# Altium PCB QVAR6_VC_Backpack.PcbDoc (part 1 of 2)
Units mm, origin at the board's own origin, x right, y up, seen from the top; angles counter-clockwise.
Board outline 19.5 x 16.5 mm, 6 copper layers (Top Layer, Layer 1 (GND), Layer 2 (signal), Layer 3 (power), Layer 4 (GND), Bottom Layer), stack 1.138 mm thick; 113 components, 78 nets, 380 pads, 126 vias.
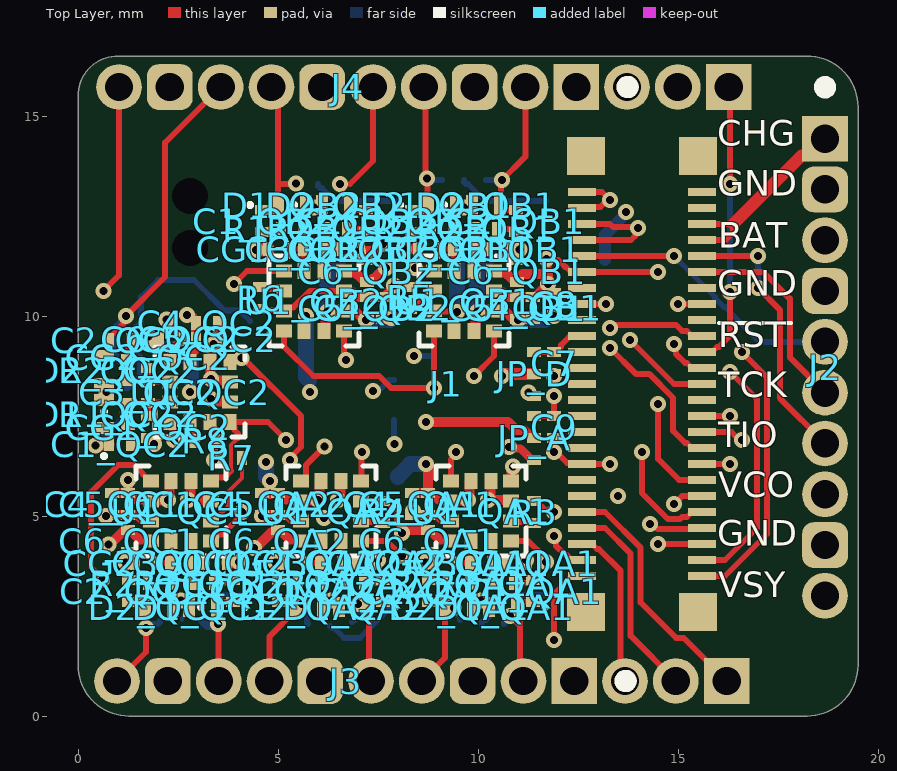
[diagram p0: Top Layer view]
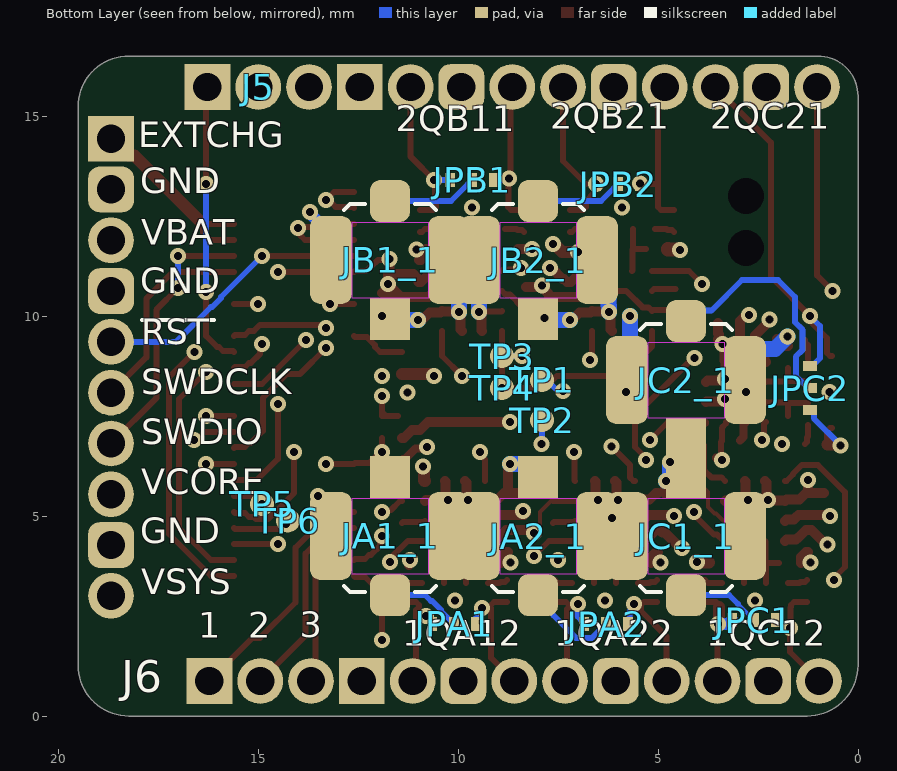
[diagram p1: Bottom Layer view, seen from below]
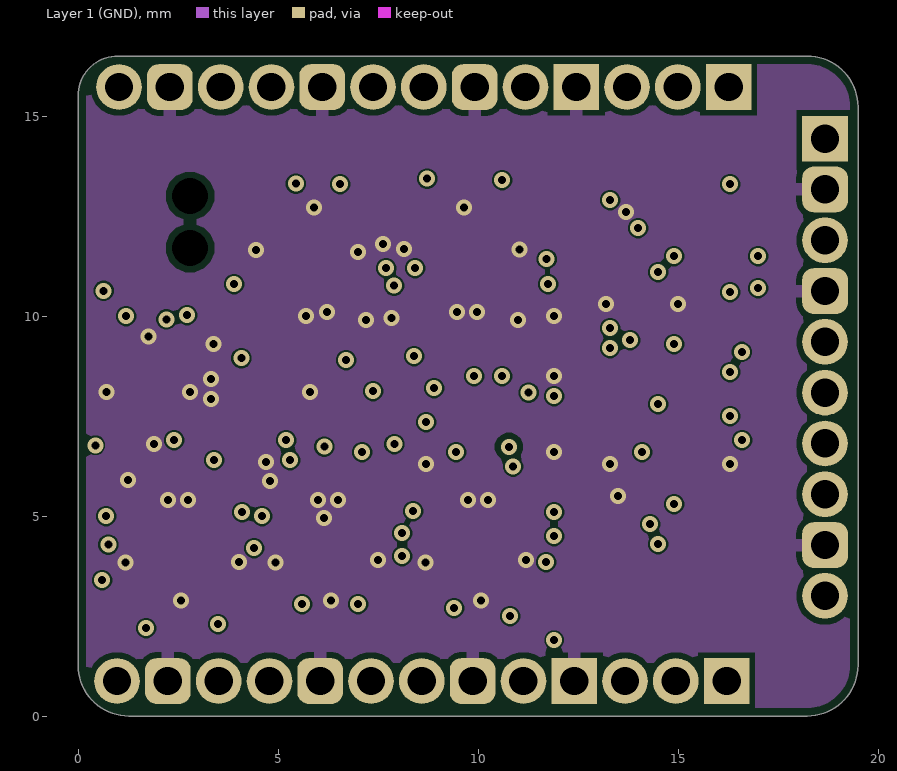
[diagram p2: Layer 1 (GND)]
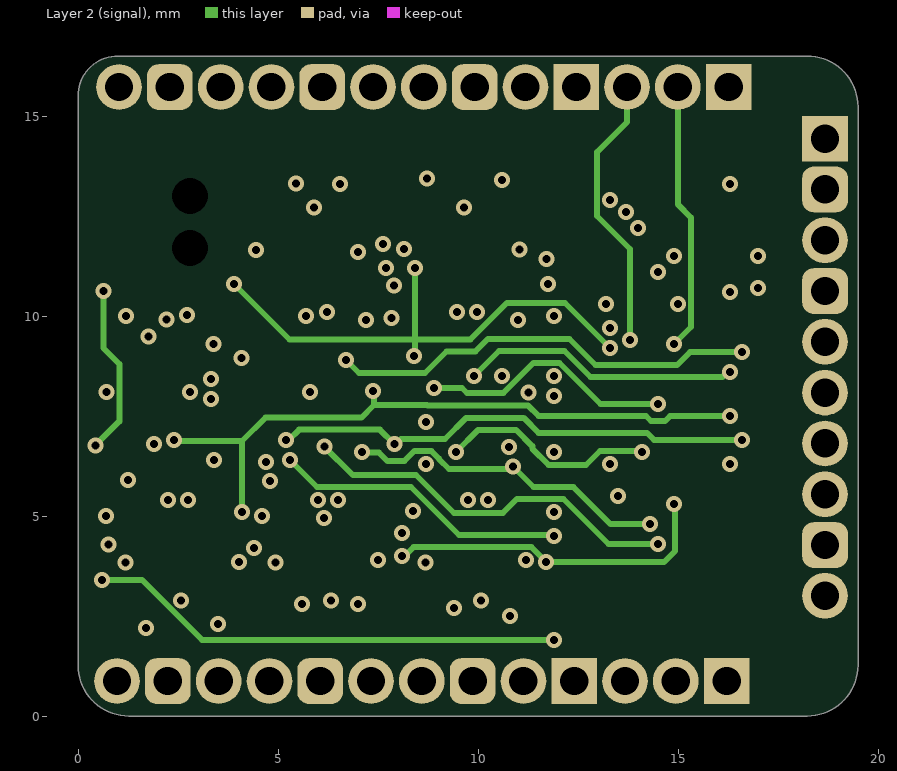
[diagram p3: Layer 2 (signal)]
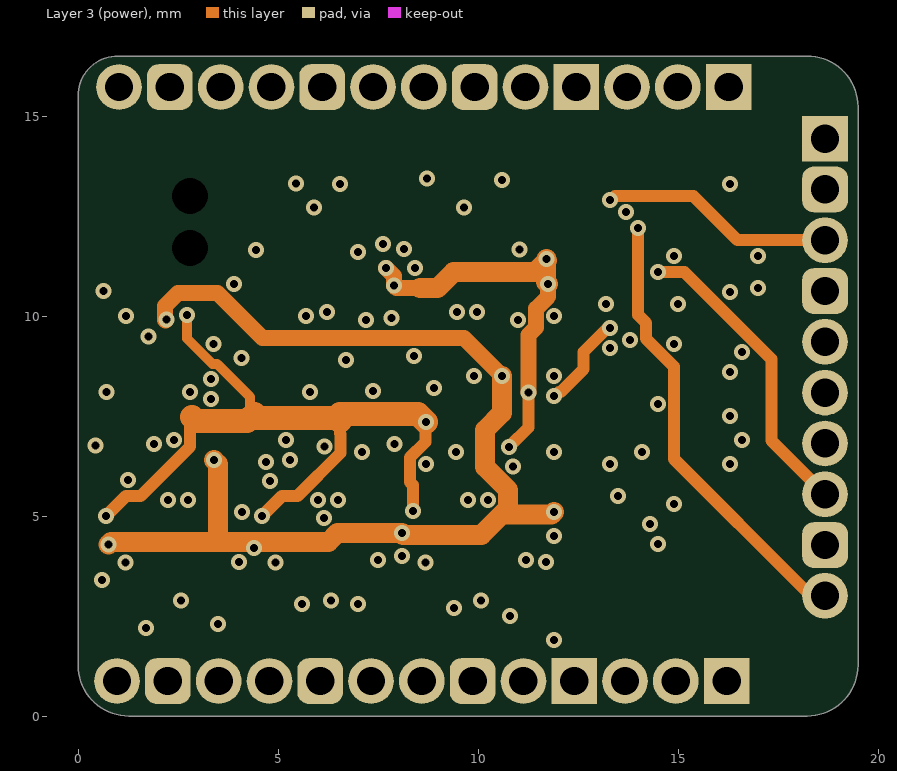
[diagram p4: Layer 3 (power)]

## Layer stack, top to bottom
Board Layer Stack Top Solder: solder mask 0.0254, SM-001, Dk 4
Top Layer: signal copper 0.035
Dielectric 1: prepreg 0.0994, 2313, Dk 4.05
Layer 1 (GND): signal copper 0.0152
Core 1: core 0.35, FR-4, Dk 4.5
Layer 2 (signal): signal copper 0.0152
Dielectric 2: prepreg 0.1088, 2116, Dk 4.25
Layer 3 (power): signal copper 0.0152
Core 2: core 0.35, FR-4, Dk 4.5
Layer 4 (GND): signal copper 0.0152
Dielectric 3: prepreg 0.0994, 2313, Dk 4.05
Bottom Layer: signal copper 0.035
Board Layer Stack Bottom Solder: solder mask 0.0254, SM-001, Dk 4

## Board outline
0,1.27 0,15.5 cw(c1,15.5) 1,16.5 18.23,16.5 cw(c18.23,15.23) 19.5,15.23 19.5,1.27 cw(c18.23,1.27) 18.23,0 1.27,0 cw(c1.27,1.27)

## Design rules (kind name [scope] priority, off if disabled: settings)
AcuteAngle [All] p1: minimum=6.00000000000000E+0001 checktracksonly=FALSE
BoardOutlineClearance [All] p1: gap=0.2 ignorepadtopadclearanceinfootprint=FALSE
Clearance Clearance_2 [OnLayer('Layer 1 (GND)') or OnLayer('Layer 2 (signal)') or OnLayer('Layer 3 (power)')] p1: gap=0.15 ignorepadtopadclearanceinfootprint=FALSE
Clearance Clearance_1 [All] p2: gap=0.1 ignorepadtopadclearanceinfootprint=FALSE
Clearance [All vs IsKeepOut] p3: gap=0 ignorepadtopadclearanceinfootprint=FALSE
ComponentClearance [All] p1: gap=0 collisioncheckmode=3 verticalgap=0.089 showdistances=TRUE donotcheckwithout3dbody=TRUE
DiffPairsRouting [All] p1: maxlimit=0.089 minlimit=0.089 mostfreqgap=0.089 toplayer_minwidth=0.089 toplayer_maxwidth=1816.048 toplayer_prefwidth=0.089 midlayer1_minwidth=0.089 midlayer1_maxwidth=1816.048 midlayer1_prefwidth=0.089 midlayer2_minwidth=0.089 midlayer2_maxwidth=1816.048 midlayer2_prefwidth=0.089 midlayer3_minwidth=0.089 midlayer3_maxwidth=1816.048 midlayer3_prefwidth=0.089 midlayer4_minwidth=0.089 midlayer4_maxwidth=1816.048 midlayer4_prefwidth=0.089 bottomlayer_minwidth=0.089 bottomlayer_maxwidth=1816.048 bottomlayer_prefwidth=0.089 maxuncoupledlength=12.7
Height [All] p1: minheight=0 maxheight=1816.048 prefheight=12.7
HoleSize [All] p1: absolutevalues=TRUE maxlimit=6.3 minlimit=0.2 maxpercent=80.000 minpercent=20.000
HoleToHoleClearance [All] p1: gap=0.25 allowstackedmicrovias=FALSE
MinimumAnnularRing [All] p1: minimumring=0.076
MinimumSolderMaskSliver [All] p1: minsoldermaskwidth=0.1
PlaneClearance [All] p1: clearance=0.089
PlaneConnect PlaneConnectPowerPads [InPadClass('PowerPads')] p1: planeconnectstyle=Direct reliefexpansion=0.508 reliefentries=4 reliefconductorwidth=0.254 reliefairgap=0.254
PlaneConnect [All] p2: pad.planeconnectstyle=Relief pad.reliefexpansion=0.3 pad.reliefentries=4 pad.reliefconductorwidth=0.089 pad.reliefairgap=0.089 via.planeconnectstyle=Direct via.reliefexpansion=0.3 via.reliefentries=4 via.reliefconductorwidth=0.127 via.reliefairgap=0.127
PolygonConnect PolygonConnectPowerPads [All vs (InPadClass('PowerPads'))] p1: connectstyle=Direct reliefconductorwidth=0.254 reliefentries=4 polygonreliefangle="90 Angle" airgapwidth=0.254
PolygonConnect [All] p2: thpad.connectstyle=Relief thpad.reliefconductorwidth=0.3 thpad.reliefentries=4 thpad.polygonreliefangle="90 Angle" thpad.airgapwidth=0.15 smdpad.connectstyle=Relief smdpad.reliefconductorwidth=0.2 smdpad.reliefentries=4 smdpad.polygonreliefangle="90 Angle" smdpad.airgapwidth=0.1 smdpad.conductorbypadedge=TRUE smdpad.mindistance=0.381 smdpad.enablemindistance=FALSE via.connectstyle=Direct via.reliefconductorwidth=0.127 via.reliefentries=4 via.polygonreliefangle="90 Angle" via.airgapwidth=0.127
RoomDefinition QA1 [InComponentClass('QA1')] p1: confinementstyle=ConfineIn formatcopy=FALSE lockcomponents=FALSE outline 7.925,2.1 11.9,2.1 11.9,6.8 7.925,6.8
RoomDefinition QB1 [InComponentClass('QB1')] p2: confinementstyle=ConfineIn formatcopy=TRUE lockcomponents=FALSE outline 11.8,13.4 7.825,13.4 7.825,8.7 11.8,8.7
RoomDefinition QB2 [InComponentClass('QB2')] p3: confinementstyle=ConfineIn formatcopy=TRUE lockcomponents=FALSE outline 8.05,13.4 4.075,13.4 4.075,8.7 8.05,8.7
RoomDefinition QC1 [InComponentClass('QC1')] p4: confinementstyle=ConfineIn formatcopy=FALSE lockcomponents=FALSE outline 0.425,2.1 4.4,2.1 4.4,6.8 0.425,6.8
RoomDefinition QA2 [InComponentClass('QA2')] p5: confinementstyle=ConfineIn formatcopy=FALSE lockcomponents=FALSE outline 4.175,2.1 8.15,2.1 8.15,6.8 4.175,6.8
RoomDefinition QC2 [InComponentClass('QC2')] p6: confinementstyle=ConfineIn formatcopy=FALSE lockcomponents=FALSE outline 0.025,10.25 0.025,6.275 4.725,6.275 4.725,10.25
RoutingVias [All] p1: holewidth=0.2 width=0.45 viastyle="Through Hole" minholewidth=0.2 minwidth=0.4 maxholewidth=6.3 maxwidth=6.55
SilkToSilkClearance [All] p1: silktosilkclearance=0
SilkToSolderMaskClearance SilkToSolderMaskClearance_1 [All] p1: minsilkscreentomaskgap=0.01 clearancetoexposedcopper=TRUE
SolderMaskExpansion SolderMaskExpansion_1 [IsVia] p1: expansion=0.102 istentingtop=TRUE
SolderMaskExpansion [All] p2: expansion=0.005 istentingtop=FALSE
Width [All] p1: maxlimit=1816.048 minlimit=0.089 preferedwidth=0.089
20 further rules are at their usual default settings.

## Classes and differential pairs
channel class QVAR: QA1 QA2 QB1 QB2 QC1 QC2
component class QC2: C1_QC2 C2_QC2 C3_QC2 C4_QC2 C5_QC2 C6_QC2 CG1_QC2 CG2_QC2 D1_QC2 D2_QC2 R1_QC2 R2_QC2 U1_QC2 U?_QC2
component class QC1: C1_QC1 C2_QC1 C3_QC1 C4_QC1 C5_QC1 C6_QC1 CG1_QC1 CG2_QC1 D1_QC1 D2_QC1 R1_QC1 R2_QC1 U1_QC1 U?_QC1
component class QB2: C1_QB2 C2_QB2 C3_QB2 C4_QB2 C5_QB2 C6_QB2 CG1_QB2 CG2_QB2 D1_QB2 D2_QB2 R1_QB2 R2_QB2 U1_QB2 U?_QB2
component class QB1: C1_QB1 C2_QB1 C3_QB1 C4_QB1 C5_QB1 C6_QB1 CG1_QB1 CG2_QB1 D1_QB1 D2_QB1 R1_QB1 R2_QB1 U1_QB1 U?_QB1
component class QA2: C1_QA2 C2_QA2 C3_QA2 C4_QA2 C5_QA2 C6_QA2 CG1_QA2 CG2_QA2 D1_QA2 D2_QA2 R1_QA2 R2_QA2 U1_QA2 U?_QA2
component class QA1: C1_QA1 C2_QA1 C3_QA1 C4_QA1 C5_QA1 C6_QA1 CG1_QA1 CG2_QA1 D1_QA1 D2_QA1 R1_QA1 R2_QA1 U1_QA1 U?_QA1

## Components (designator, comment, footprint, x,y, rotation, side; value= is the part's Value field where it differs from the comment)
C1_QA1 "470pF" CAP_0201 11.375,3.125 r90 top (schematic designator C1)
C1_QA2 "470pF" CAP_0201 7.625,3.125 r90 top (schematic designator C1)
C1_QB1 "470pF" CAP_0201 8.35,12.375 r270 top (schematic designator C1)
C1_QB2 "470pF" CAP_0201 4.6,12.375 r270 top (schematic designator C1)
C1_QC1 "470pF" CAP_0201 3.875,3.125 r90 top (schematic designator C1)
C1_QC2 "470pF" CAP_0201 1.05,6.8 r0 top (schematic designator C1)
C2_QA1 "470pF" CAP_0201 8.775,3.125 r90 top (schematic designator C2)
C2_QA2 "470pF" CAP_0201 5.025,3.125 r90 top (schematic designator C2)
C2_QB1 "470pF" CAP_0201 10.95,12.375 r270 top (schematic designator C2)
C2_QB2 "470pF" CAP_0201 7.2,12.375 r270 top (schematic designator C2)
C2_QC1 "470pF" CAP_0201 1.275,3.125 r90 top (schematic designator C2)
C2_QC2 "470pF" CAP_0201 1.05,9.4 r0 top (schematic designator C2)
C3_QA1 "110pF" CAP_0201 10.075,3.825 r180 top (schematic designator C3)
C3_QA2 "110pF" CAP_0201 6.325,3.825 r180 top (schematic designator C3)
C3_QB1 "110pF" CAP_0201 9.65,11.675 r0 top (schematic designator C3)
C3_QB2 "110pF" CAP_0201 5.9,11.675 r0 top (schematic designator C3)
C3_QC1 "110pF" CAP_0201 2.575,3.825 r180 top (schematic designator C3)
C3_QC2 "110pF" CAP_0201 1.75,8.1 r90 top (schematic designator C3)
C4_QA1 "1µF" CAP_0201 8.35,5.299 r90 top (schematic designator C4)
C4_QA2 "1µF" CAP_0201 4.6,5.299 r90 top (schematic designator C4)
C4_QB1 "1µF" CAP_0201 11.375,10.201 r270 top (schematic designator C4)
C4_QB2 "1µF" CAP_0201 7.625,10.201 r270 top (schematic designator C4)
C4_QC1 "1µF" CAP_0201 0.85,5.299 r90 top (schematic designator C4)
C4_QC2 "1µF" CAP_0201 3.224,9.825 r0 top (schematic designator C4)
C5_QA1 "100 nF" CAP_0201 8.75,5.3 r270 top (schematic designator C5)
C5_QA2 "100 nF" CAP_0201 5,5.3 r270 top (schematic designator C5)
C5_QB1 "100 nF" CAP_0201 10.975,10.2 r90 top (schematic designator C5)
C5_QB2 "100 nF" CAP_0201 7.225,10.2 r90 top (schematic designator C5)
C5_QC1 "100 nF" CAP_0201 1.25,5.3 r270 top (schematic designator C5)
C5_QC2 "100 nF" CAP_0201 3.225,9.425 r180 top (schematic designator C5)
C6_QA1 "100 nF" CAP_0201 8.75,4.375 r90 top (schematic designator C6)
C6_QA2 "100 nF" CAP_0201 5,4.375 r90 top (schematic designator C6)
C6_QB1 "100 nF" CAP_0201 10.975,11.125 r270 top (schematic designator C6)
C6_QB2 "100 nF" CAP_0201 7.225,11.125 r270 top (schematic designator C6)
C6_QC1 "100 nF" CAP_0201 1.25,4.375 r90 top (schematic designator C6)
C6_QC2 "100 nF" CAP_0201 2.3,9.425 r0 top (schematic designator C6)
C7 "1µF" CAP_0201 11.9,8.825 r270 top
C8 "1µF" CAP_0201 11.9,10.3 r270 top
C9 "1µF" CAP_0201 11.9,7.225 r270 top
CG1_QA1 "110pF" CAP_0201 10.95,3.825 r180 top (schematic designator CG1)
CG1_QA2 "110pF" CAP_0201 7.2,3.825 r180 top (schematic designator CG1)
CG1_QB1 "110pF" CAP_0201 8.775,11.675 r0 top (schematic designator CG1)
CG1_QB2 "110pF" CAP_0201 5.025,11.675 r0 top (schematic designator CG1)
CG1_QC1 "110pF" CAP_0201 3.45,3.825 r180 top (schematic designator CG1)
CG1_QC2 "110pF" CAP_0201 1.75,7.225 r90 top (schematic designator CG1)
CG2_QA1 "110pF" CAP_0201 9.2,3.825 r0 top (schematic designator CG2)
CG2_QA2 "110pF" CAP_0201 5.45,3.825 r0 top (schematic designator CG2)
CG2_QB1 "110pF" CAP_0201 10.525,11.675 r180 top (schematic designator CG2)
CG2_QB2 "110pF" CAP_0201 6.775,11.675 r180 top (schematic designator CG2)
CG2_QC1 "110pF" CAP_0201 1.7,3.825 r0 top (schematic designator CG2)
CG2_QC2 "110pF" CAP_0201 1.75,8.975 r270 top (schematic designator CG2)
D1_QA1 "TPD1E01B04DPYRQ1" TPD1E01B04DPYRQ1 10.625,2.725 r180 top (schematic designator D1)
D1_QA2 "TPD1E01B04DPYRQ1" TPD1E01B04DPYRQ1 6.875,2.725 r180 top (schematic designator D1)
D1_QB1 "TPD1E01B04DPYRQ1" TPD1E01B04DPYRQ1 9.1,12.775 r0 top (schematic designator D1)
D1_QB2 "TPD1E01B04DPYRQ1" TPD1E01B04DPYRQ1 5.35,12.775 r0 top (schematic designator D1)
D1_QC1 "TPD1E01B04DPYRQ1" TPD1E01B04DPYRQ1 3.125,2.725 r180 top (schematic designator D1)
D1_QC2 "TPD1E01B04DPYRQ1" TPD1E01B04DPYRQ1 0.65,7.55 r90 top (schematic designator D1)
D2_QA1 "TPD1E01B04DPYRQ1" TPD1E01B04DPYRQ1 9.525,2.725 r180 top (schematic designator D2)
D2_QA2 "TPD1E01B04DPYRQ1" TPD1E01B04DPYRQ1 5.775,2.725 r180 top (schematic designator D2)
D2_QB1 "TPD1E01B04DPYRQ1" TPD1E01B04DPYRQ1 10.2,12.775 r0 top (schematic designator D2)
D2_QB2 "TPD1E01B04DPYRQ1" TPD1E01B04DPYRQ1 6.45,12.775 r0 top (schematic designator D2)
D2_QC1 "TPD1E01B04DPYRQ1" TPD1E01B04DPYRQ1 2.025,2.725 r180 top (schematic designator D2)
D2_QC2 "TPD1E01B04DPYRQ1" TPD1E01B04DPYRQ1 0.65,8.65 r90 top (schematic designator D2)
J1 "VitalCore Interface v1.0" BACKPACK_INTERFACE_V1.0_2mm 1,8.3 r0 top
J2 "FTS-110-01-L-S" SAMTEC-FTS-110-01-L-S#1 18.675,8.72 r270 top
J3 "FTS-110-01-L-S" SAMTEC-FTS-110-01-L-S#2 6.69,0.875 r180 top
J4 "FTS-110-01-L-S" SAMTEC-FTS-110-01-L-S#2 6.74,15.725 r180 top
J5 "FTS-103-01-L-S" SAMTEC-FTS-103-01-X-S 14.995,15.725 r180 bottom
J6 "FTS-103-01-L-S" SAMTEC-FTS-103-01-X-S 14.945,0.875 r180 bottom
JA1_1 "CONMHF1-SMD-G-T" C-CONMHF1-SMD-G-T 11.7,4.5 r0 bottom
JA2_1 "CONMHF1-SMD-G-T" C-CONMHF1-SMD-G-T 8,4.5 r0 bottom
JB1_1 "CONMHF1-SMD-G-T" C-CONMHF1-SMD-G-T 11.7,11.4 r180 bottom
JB2_1 "CONMHF1-SMD-G-T" C-CONMHF1-SMD-G-T 8,11.4 r180 bottom
JC1_1 "CONMHF1-SMD-G-T" C-CONMHF1-SMD-G-T 4.3,4.5 r0 bottom
JC2_1 "CONMHF1-SMD-G-T" C-CONMHF1-SMD-G-T 4.3,8.4 r180 bottom
JP_A "JMP" JMP_0201_3way 11.4,6.95 r270 top
JP_D "JMP" JMP_0201_3way 11.4,8.55 r270 top
JPA1 "JMP" JMP_0201_3way 10.1,2.3 r180 bottom
JPA2 "JMP" JMP_0201_3way 6.3,2.3 r180 bottom
JPB1 "JMP" JMP_0201_3way 9.65,13.4 r0 bottom
JPB2 "JMP" JMP_0201_3way 6,13.3 r0 bottom
JPC1 "JMP" JMP_0201_3way 2.6,2.4 r180 bottom
JPC2 "JMP" JMP_0201_3way 1.2,8.2 r90 bottom
R1_QA1 "4.7k" RES_0201 10.625,3.325 r180 top (schematic designator R1)
R1_QA2 "4.7k" RES_0201 6.875,3.325 r180 top (schematic designator R1)
R1_QB1 "4.7k" RES_0201 9.1,12.175 r0 top (schematic designator R1)
R1_QB2 "4.7k" RES_0201 5.35,12.175 r0 top (schematic designator R1)
R1_QC1 "4.7k" RES_0201 3.125,3.325 r180 top (schematic designator R1)
R1_QC2 "4.7k" RES_0201 1.25,7.55 r90 top (schematic designator R1)
R2_QA1 "4.7k" RES_0201 9.525,3.325 r0 top (schematic designator R2)
R2_QA2 "4.7k" RES_0201 5.775,3.325 r0 top (schematic designator R2)
R2_QB1 "4.7k" RES_0201 10.2,12.175 r180 top (schematic designator R2)
R2_QB2 "4.7k" RES_0201 6.45,12.175 r180 top (schematic designator R2)
R2_QC1 "4.7k" RES_0201 2.025,3.325 r0 top (schematic designator R2)
R2_QC2 "4.7k" RES_0201 1.25,8.65 r270 top (schematic designator R2)
R3 "4.7k" RES_0201 11.4,5.1 r270 top
R4 "4.7k" RES_0201 7.625,5.102 r270 top
R5 "4.7k" RES_0201 8.3,10.45 r270 top
R6 "4.7k" RES_0201 4.55,10.45 r90 top
R7 "4.7k" RES_0201 3.825,6.446 r0 top
R8 "4.7k" RES_0201 3.182,6.876 r180 top
TP1 "Test Pad" Pad-0.6mm 7.9,8.4 r90 bottom
TP2 "Test Pad" Pad-0.6mm 7.9,7.4 r90 bottom
TP3 "Test Pad" Pad-0.6mm 8.9,9 r90 bottom
TP4 "Test Pad" Pad-0.6mm 8.9,8.2 r90 bottom
TP5 "Test Pad" Pad-0.6mm 14.9,5.3 r90 bottom
TP6 "Test Pad" Pad-0.6mm 14.252,4.886 r90 bottom
U1_QA1 "LIS2DUXS12TR" QFN_DUXS12_STM-M 10.075,5.125 r180 top (schematic designator U1)
U1_QA2 "LIS2DUXS12TR" QFN_DUXS12_STM-M 6.325,5.125 r180 top (schematic designator U1)
U1_QB1 "LIS2DUXS12TR" QFN_DUXS12_STM-M 9.65,10.375 r0 top (schematic designator U1)
U1_QB2 "LIS2DUXS12TR" QFN_DUXS12_STM-M 5.9,10.375 r0 top (schematic designator U1)
U1_QC1 "LIS2DUXS12TR" QFN_DUXS12_STM-M 2.575,5.125 r180 top (schematic designator U1)
U1_QC2 "LIS2DUXS12TR" QFN_DUXS12_STM-M 3.05,8.1 r90 top (schematic designator U1)

## Footprints (in the part's own frame and the unit in brackets; to place one, negate y for a bottom-side part, rotate by r counter-clockwise, add the part's x,y. Pads: shape width x height; smd on the part's side, far side on the other; paste and mask are expansions set on the pad)
BACKPACK_INTERFACE_V1.0_2mm [mm]
  rect 0.7x0.2 smd: 1(11.6,4.8) 2(11.6,4.4) 3(11.6,4) 4(11.6,3.6) 5(11.6,3.2) 6(11.6,2.8) 7(11.6,2.4) 8(11.6,2) 9(11.6,1.6) 10(11.6,1.2) 11(11.6,0.8) 12(11.6,0.4) 13(11.6,0) 14(11.6,-0.4) 15(11.6,-0.8) 16(11.6,-1.2) 17(11.6,-1.6) 18(11.6,-2) 19(11.6,-2.4) 20(11.6,-2.8) 21(11.6,-3.2) 22(11.6,-3.6) 23(11.6,-4) 24(11.6,-4.4) 25(11.6,-4.8) 26(14.6,-4.8) 27(14.6,-4.4) 28(14.6,-4) 29(14.6,-3.6) 30(14.6,-3.2) 31(14.6,-2.8) 32(14.6,-2.4) 33(14.6,-2) 34(14.6,-1.6) 35(14.6,-1.2) 36(14.6,-0.8) 37(14.6,-0.4) 38(14.6,0) 39(14.6,0.4) 40(14.6,0.8) 41(14.6,1.2) 42(14.6,1.6) 43(14.6,2) 44(14.6,2.4) 45(14.6,2.8) 46(14.6,3.2) 47(14.6,3.6) 48(14.6,4) 49(14.6,4.4) 50(14.6,4.8)
  round 0 hole 0.9 unplated: E(1.8,3.4) E(1.8,4.7)
  rect 0.95x0.95 smd: E(11.7,-5.7) E(11.7,5.7) E(14.5,-5.7) E(14.5,5.7)
  body extent 0,-6.3 14.79,6.3, height 2.9
C-CONMHF1-SMD-G-T [mm]
  rrect50% 1.05x2.2 smd: G(-1.475,0) G(1.475,0)
  rect 1x1.05 smd: G(0,-1.475)
  rrect50% 1x1.05 smd: S(0,1.475)
  Top Layer keep-out region: -0.95,0.95 0.95,0.95 0.95,-0.95 -0.95,-0.95
  silkscreen extent -1.15,1.25 1.15,1.4, body extent -1.5,-1.55 1.5,1.55, height 1.31
CAP_0201 [mm]
  rect 0.25x0.35 smd: 1(-0.275,0) 2(0.275,0)
  body extent -0.3,-0.15 0.3,0.15, height 0.3
JMP_0201_3way [mm] "Jumper 3 pins 0201x2"
  rect 0.25x0.35 smd: 1(-0.55,0) 2(0,0) 3(0.55,0)
  body extent -0.57,-0.15 0.57,0.15, height 0.22
Pad-0.6mm [mm] "SMT Test Pad"
  round 0.6 smd paste-5: 1(0,0)
QFN_DUXS12_STM-M [mil]
  rect 15.94x12.97 smd paste+0 mask+0: 1(-29.5,29.53) 2(-29.5,9.85) 3(-29.5,-9.84) 4(-29.5,-29.53) 7(29.5,-29.53) 8(29.5,-9.84) 9(29.5,9.85) 10(29.5,29.53)
  rect 12.97x15.94 smd paste+0 mask+0: 5(-9.84,-29.5) 6(9.85,-29.5) 11(9.85,29.5) 12(-9.84,29.5)
  silkscreen extent -44,-44 44,44, body extent -41,-41 41,41, height 29
RES_0201 [mm] "Chip Resistor, 2-Leads, Body 0.60x0.30mm, IPC Medium Density"
  rect 0.25x0.35 smd: 1(-0.275,0) 2(0.275,0)
  body extent -0.3,-0.15 0.3,0.15, height 0.22
SAMTEC-FTS-103-01-X-S [mil]
  rect 45x45 hole 27.95 mask+0: 1(-50,0)
  round 45 hole 27.95 mask+0: 2(0,0) 3(50,0)
  body extent -75,-43 75,43, height 154
SAMTEC-FTS-110-01-L-S#1 [mil]
  rect 45x45 hole 27.95 mask+0: 1(-225,0)
  rrect50% 45x45 hole 27.95 mask+0: 2(-175,0) 4(-75,0) 9(175,0)
  round 45 hole 27.95 mask+0: 3(-125,0) 5(-25,0) 6(25,0) 7(75,0) 8(125,0) 10(225,0)
  silkscreen extent -281,-5 -270,6, body extent -250,-43 250,43, height 154
SAMTEC-FTS-110-01-L-S#2 [mil]
  rect 45x45 hole 27.95 mask+0: 1(-225,0)
  round 45 hole 27.95 mask+0: 2(-175,0) 4(-75,0) 5(-25,0) 7(75,0) 8(125,0) 10(225,0)
  rrect50% 45x45 hole 27.95 mask+0: 3(-125,0) 6(25,0) 9(175,0)
  silkscreen extent -281,-6 -270,6, body extent -250,-43 250,43, height 154
TPD1E01B04DPYRQ1 [mm]
  rect 0.3x0.5 smd: 1(-0.35,0) 2(0.35,0)
  silkscreen extent -1.1,-0.05 -1,0.05, body extent -0.5,-0.3 0.5,0.3, height 0.55

## Part data
C1_QA1 C1_QA2 C1_QB1 C1_QB2 C1_QC1 C1_QC2 C2_QA1 C2_QA2 C2_QB1 C2_QB2 C2_QC1 C2_QC2: library part CAP_0201_470p_25V, "CAP CER 470PF 25V C0G 0201", Capacitor Type=Ceramic, Case/Package=0201, Manufacturer=Murata, Manufacturer Part Number=GRM0335C1E471JA01D, Max Operating Temperature=125°C, Min Operating Temperature=-55°C, Package Shape=Rectangular, Rated DC Voltage (URdc)=25V, Supplier Part Number 1=490-16370-6-ND, Temperature Characteristics Code=C0G, Tolerance  (fill in as +-)=5%, Category="Ceramic Capacitors", ComponentLink1Description=https://psearch.en.murata.com:443/capacitor/product/GRM0335C1E471JA01%23.pdf?src-supplier=IHS+Markit, ComponentLink1URL=https://psearch.en.murata.com:443/capacitor/product/GRM0335C1E471JA01%23.pdf?src-supplier=IHS+Markit, ComponentLink2Description=http://search.murata.co.jp/Ceramy/image/img/A01X/G101/ENG/GRM0335C1E471JA01-01.pdf?src-supplier=Digi-Key, ComponentLink2URL=http://search.murata.co.jp/Ceramy/image/img/A01X/G101/ENG/GRM0335C1E471JA01-01.pdf?src-supplier=Digi-Key, ComponentLink3Description=https://search.murata.co.jp/Ceramy/image/img/A01X/G101/ENG/GRM0335C1E471JA01-01.pdf?src-supplier=Digi-Key, ComponentLink3URL=https://search.murata.co.jp/Ceramy/image/img/A01X/G101/ENG/GRM0335C1E471JA01-01.pdf?src-supplier=Digi-Key, ComponentLink4Description=https://datasheet.octopart.com/GRM0335C1E471JA01D-Murata-datasheet-165579666.pdf?src-supplier=TME, ComponentLink4URL=https://datasheet.octopart.com/GRM0335C1E471JA01D-Murata-datasheet-165579666.pdf?src-supplier=TME, Dielectric Material=Ceramic, JESD-609 Code=e3, Mounting Technology="Surface Mount", Multilayer=Yes, Packaging="Tape and Reel", Pins=2, Pricing 1="1=0.1, 10=0.012, 50=0.0066, 100=0.0054, 500=0.00382, 1000=0.003, 2500=0.00273, 5000=0.00251 (USD)", Reach SVHC Compliant=Yes, RoHS=Yes, RoHS Compliant=Yes, Stock 1=235620, Supplier 1=Digi-Key, Terminal Finish=Tin, Termination=Wraparound, Tolerance (fill in as +-)=5%
C3_QA1 C3_QA2 C3_QB1 C3_QB2 C3_QC1 C3_QC2 CG1_QA1 CG1_QA2 CG1_QB1 CG1_QB2 CG1_QC1 CG1_QC2 CG2_QA1 CG2_QA2 CG2_QB1 CG2_QB2 CG2_QC1 CG2_QC2: library part CAP_0201_110p_50V, "CAP CER 110PF 50V C0G 0201", Manufacturer=Murata, Manufacturer Part Number=GRM0335C1H111JA01D, Supplier Part Number 1=81-GRM0335C1H111JA1D, Supplier 1=Mouser
C4_QA1 C4_QA2 C4_QB1 C4_QB2 C4_QC1 C4_QC2 C7 C8 C9: library part CAP_0201_1u_10V, "CAP CER 1UF 10V X6S", Manufacturer=Murata, Manufacturer Part Number=GRM033C81A105ME05D, Supplier Part Number 1=81-GRM033C81A105ME5D, Supplier 1=Mouser
C5_QA1 C5_QA2 C5_QB1 C5_QB2 C5_QC1 C5_QC2 C6_QA1 C6_QA2 C6_QB1 C6_QB2 C6_QC1 C6_QC2: library part CAP_0201_100n_10V, "CAP CER 0.1UF 10V X5R 0201", Manufacturer=Murata, Manufacturer Part Number=GRM033Z71A104KE14D, Supplier Part Number 1=81-GRM033Z71A104KE4D, Supplier 1=Mouser
D1_QA1 D1_QA2 D1_QB1 D1_QB2 D1_QC1 D1_QC2 D2_QA1 D2_QA2 D2_QB1 D2_QB2 D2_QC1 D2_QC2: "TVS Diode (Bi-directional)", Manufacturer_Name="Texas Instruments", Mouser Part Number=595-TPD1E01B04DPYRQ1, Arrow Part Number=TPD1E01B04DPYRQ1, Arrow Price/Stock=https://www.arrow.com/en/products/tpd1e01b04dpyrq1/texas-instruments?region=nac, Datasheet Link=https://www.ti.com/lit/ds/symlink/tpd1e01b04-q1.pdf?ts=1677834076075&ref_url=https%253A%252F%252Fwww.ti.com%252Fproduct%252FTPD1E01B04-Q1%252Fpart-details%252FTPD1E01B04DPYRQ1, Height=0.45mm, Manufacturer_Part_Number=TPD1E01B04DPYRQ1, Mouser Price/Stock=https://www.mouser.co.uk/ProductDetail/Texas-Instruments/TPD1E01B04DPYRQ1?qs=doiCPypUmgEwTnvBpZhkOw%3D%3D
J1: library part BACKPACK_INTERFACE_V1.0, Manufacturer=Hirose, Manufacturer Part Number=DF40C(2.0)-50DS-0.4V(51), Supplier Part Number 1=798-DF40C2050DS04V51, Supplier 1=Mouser, System=Connector
J2 J3 J4: "Pinheader 10 pin, 1.27mm", Flammability Rating="UL94 V-0", Manufacturer=Samtec, Manufacturer Series=FTS, Supplier Part Number 1=200-FTS11001LS, Additional Feature="Low Profile", Category=Connectors, ComponentLink1Description=https://datasheet.ciiva.com:443/pdfs/VipMasterIC/IC/SAMI/SAMI-S-A0001504673/SAMI-S-A0001504673-1.pdf?src-supplier=IHS+Markit, ComponentLink1URL=https://datasheet.ciiva.com:443/pdfs/VipMasterIC/IC/SAMI/SAMI-S-A0001504673/SAMI-S-A0001504673-1.pdf?src-supplier=IHS+Markit, ComponentLink2Description=http://www.samtec.com/documents/webfiles/pdf/FTS.pdf?src-supplier=Avnet, ComponentLink2URL=http://www.samtec.com/documents/webfiles/pdf/FTS.pdf?src-supplier=Avnet, ComponentLink3Description=https://datasheet.octopart.com/FTS-110-01-L-S-Samtec-datasheet-151470456.pdf?src-supplier=Sager+Electronics, ComponentLink3URL=https://datasheet.octopart.com/FTS-110-01-L-S-Samtec-datasheet-151470456.pdf?src-supplier=Sager+Electronics, ComponentLink4Description=https://datasheet.octopart.com/FTS-110-01-L-S-Samtec-datasheet-118493358.pdf?src-supplier=Electro+Sonic, ComponentLink4URL=https://datasheet.octopart.com/FTS-110-01-L-S-Samtec-datasheet-118493358.pdf?src-supplier=Electro+Sonic, ComponentLink5Description=https://datasheet.octopart.com/FTS-110-01-L-S-Samtec-datasheet-116535195.pdf?src-supplier=Toby+Electronics, ComponentLink5URL=https://datasheet.octopart.com/FTS-110-01-L-S-Samtec-datasheet-116535195.pdf?src-supplier=Toby+Electronics, Connector Type="BOARD CONNECTOR", Contact Finish - Mating="GOLD (10) OVER NICKEL (50)", Contact Finish - Termination="Matte Tin (Sn) - with Nickel (Ni) barrier", Contact Gender=Male, Contact Material=Bronze, DIN Conformance=No, Filter Feature=No, IEC Conformance=No, JESD-609 Code=e3, Manufacturer Part Number=FTS-110-01-L-S, MIL Conformance=No, Mixed Contacts=No, Mounting Style=STRAIGHT, Mounting Technology=Board, Number of Contacts=10, Number of Rows Loaded=1, Option="General Purpose", Pricing 1="1=2.85, 10=2.62, 50=2.62, 100=2.28, 1000=1.66, 10000=1.48 (USD)", Reach SVHC Compliant=Yes, RoHS=Yes, RoHS Compliant=Yes, Stock 1=83, Supplier 1=Mouser, Terminal Pitch=1.27mm, Termination=Solder
J5 J6: "Pinheader 3 pin, 1.27mm", Flammability Rating="UL94 V-0", Manufacturer=Samtec, Manufacturer Series=FTS, Additional Feature="Low Profile", Category=Connectors, ComponentLink1Description=https://datasheet.ciiva.com:443/pdfs/VipMasterIC/IC/SAMI/SAMI-S-A0001504673/SAMI-S-A0001504673-1.pdf?src-supplier=IHS+Markit, ComponentLink1URL=https://datasheet.ciiva.com:443/pdfs/VipMasterIC/IC/SAMI/SAMI-S-A0001504673/SAMI-S-A0001504673-1.pdf?src-supplier=IHS+Markit, ComponentLink2Description=http://suddendocs.samtec.com/prints/fts-1xx-xx-x-sx-mkt.pdf?src-supplier=Digi-Key, ComponentLink2URL=http://suddendocs.samtec.com/prints/fts-1xx-xx-x-sx-mkt.pdf?src-supplier=Digi-Key, ComponentLink3Description=http://suddendocs.samtec.com/prints/fts-1xx-xx-xx-xx-xx-mkt.pdf?src-supplier=Digi-Key, ComponentLink3URL=http://suddendocs.samtec.com/prints/fts-1xx-xx-xx-xx-xx-mkt.pdf?src-supplier=Digi-Key, ComponentLink4Description=ftp://ftp.samtec.com/webfiles/PDF/FTS.PDF?src-supplier=Avnet, ComponentLink4URL=ftp://ftp.samtec.com/webfiles/PDF/FTS.PDF?src-supplier=Avnet, Connector Type="BOARD CONNECTOR", Contact Finish - Mating="GOLD (10) OVER NICKEL (50)", Contact Finish - Termination="Matte Tin (Sn) - with Nickel (Ni) barrier", Contact Gender=Male, Contact Material=Bronze, DIN Conformance=No, Filter Feature=No, IEC Conformance=No, JESD-609 Code=e3, Manufacturer Part Number=FTS-103-01-L-S, MIL Conformance=No, Mixed Contacts=No, Mounting Style=STRAIGHT, Mounting Technology=Board, Number of Contacts=3, Number of Rows Loaded=1, Option="General Purpose", Pricing 1="1=1.334, 5=1.281, 10=1.208 (CHF)", Reach SVHC Compliant=Yes, RoHS=Yes, RoHS Compliant=Yes, Stock 1=187, Supplier 1=Rs, Terminal Pitch=1.27mm, Termination=Solder
JA1_1 JA2_1 JB1_1 JB2_1 JC1_1 JC2_1: "Conn Umc Jack Str SMD", Manufacturer=Linx, Category="RF / Coaxial Connectors", Manufacturer Part Number=CONMHF1-SMD-G-T, Pricing 1="2=0.54, 20=0.39, 100=0.33, 500=0.27 (EUR)", RoHS=No, Stock 1=263, Supplier 1=TME
JP_A JP_D JPA1 JPA2 JPB1 JPB2 JPC1 JPC2: library part JMP_0201_3w, "JMP 0201 3W"
R1_QA1 R1_QA2 R1_QB1 R1_QB2 R1_QC1 R1_QC2 R2_QA1 R2_QA2 R2_QB1 R2_QB2 R2_QC1 R2_QC2 R3 R4 R5 R6 R7 R8: library part R_0201_4.7K, "R 4.7K 1% 50mW 0201", Case/Package=0201, Manufacturer=Panasonic, Manufacturer Part Number=ERJ-1GNF4701C, Max Operating Temperature=125°C, Min Operating Temperature=-55°C, Package Height=0.23mm, Package Length=0.6mm, Package Shape=Rectangular, Package Style=SMTMeter, Package Width=0.3mm, Power=50mW, Rated Temperature=70°C, Resistor Type="FIXED RESISTOR", Supplier Part Number 1=667-ERJ-1GNF4701C, Temperature Coefficient=200ppm/°C, Tolerance=1%, Working Voltage=25V, Category="Chip SMD Resistors", ComponentLink1Description=https://datasheet.ciiva.com:443/pdfs/VipMasterIC/IC/PANA/PANA-S-A0009889626/PANA-S-A0009889626-1.pdf?src-supplier=IHS+Markit, ComponentLink1URL=https://datasheet.ciiva.com:443/pdfs/VipMasterIC/IC/PANA/PANA-S-A0009889626/PANA-S-A0009889626-1.pdf?src-supplier=IHS+Markit, ComponentLink2Description=https://datasheet.ciiva.com/30079/erj1gn-30079779.pdf?src-supplier=Onlinecomponents.com, ComponentLink2URL=https://datasheet.ciiva.com/30079/erj1gn-30079779.pdf?src-supplier=Onlinecomponents.com, ComponentLink3Description=https://datasheet.ciiva.com/43467/1678782-43467070.pdf?src-supplier=Farnell, ComponentLink3URL=https://datasheet.ciiva.com/43467/1678782-43467070.pdf?src-supplier=Farnell, ComponentLink4Description=https://datasheet.ciiva.com/46375/1678782-46375115.pdf?src-supplier=Element14, ComponentLink4URL=https://datasheet.ciiva.com/46375/1678782-46375115.pdf?src-supplier=Element14, ComponentLink5Description=https://datasheet.ciiva.com/22743/1678782-22743083.pdf?src-supplier=Element14, ComponentLink5URL=https://datasheet.ciiva.com/22743/1678782-22743083.pdf?src-supplier=Element14, ComponentLink6Description=https://datasheet.ciiva.com/16201/aoa0000ce2-16201382.pdf?src-supplier=Future+Electronics, ComponentLink6URL=https://datasheet.ciiva.com/16201/aoa0000ce2-16201382.pdf?src-supplier=Future+Electronics, ComponentLink7Description=https://datasheet.ciiva.com/7830/1678782-7830714.pdf?src-supplier=Element14, ComponentLink7URL=https://datasheet.ciiva.com/7830/1678782-7830714.pdf?src-supplier=Element14, ComponentLink8Description=https://datasheet.ciiva.com/22743/1678782-22743082.pdf?src-supplier=Element14, ComponentLink8URL=https://datasheet.ciiva.com/22743/1678782-22743082.pdf?src-supplier=Element14, Construction=Rectangular, JESD-609 Code=e3, Mounting Technology="Surface Mount", Packaging="Tape and Reel", Pins=2, Pricing 1="1=0.1, 10=0.03, 50=0.03, 100=0.014, 1000=0.01, 10000=0.007 (USD)", Reach SVHC Compliant=Yes, Reference Standard=AEC-Q200, RoHS=Yes, RoHS Compliant=Yes, Stock 1=436636, Supplier 1=Mouser, Technology="METAL GLAZE/THICK FILM", Terminal Finish=Nickel, Termination=Wraparound
TP1 TP2 TP3 TP4 TP5 TP6: library part CMP-00224-2, "0.6mm SMT Test Pad", Mounting Technology=SMT
U1_QA1 U1_QA2 U1_QB1 U1_QB2 U1_QC1 U1_QC2: "IC IMU QVAR", Mfr_Name=STMicroelectronics, Copyright="Copyright (C) 2023 Ultra Librarian. All rights reserved.", Manufacturer_Part_Number=LIS2DUXS12TR, RefDes=RefDes, Type=DEV

## Via types
v1: diameter 0.4, hole 0.2, Top Layer to Bottom Layer, tented both sides, 126 vias

## Nets (pads, with @x,y where several pads share a name; then routed paths per layer and width w, separated by ;. In a path a pad name is that pad's centre, name@x,y a point inside that pad or via, vN(x,y) a via of type N, cw(c..) or ccw(c..) an arc to the next point about the centre after c; other vN are vias at no path point)
A1V8_VDD: C4_QA1.1 C4_QA2.1 C4_QC1.1 C4_QC2.1 C5_QA1.2 C5_QA2.2 C5_QC1.2 C5_QC2.2 JP_A.2 U1_QA1.9 U1_QA2.9 U1_QC1.9 U1_QC2.9 | length 26.7
  Top Layer w0.25: C4_QC1.1 C5_QC1.2@1.199,5.024 ; C5_QC1.2@1.2,5.025 1.49,5.025 1.515,5 1.518,5 1.604,4.915 1.786,4.915 U1_QC1.9 ; v1(2.725,10.025) 2.754,9.996 2.828,9.996 2.949,9.875 2.949,9.476 2.95,9.185 2.925,9.16 2.925,9.157 2.84,9.071 2.84,8.889 U1_QC2.9 ; v1(4.6,5) C4_QA2.1 C5_QA2.2@4.949,5.024 ; C5_QA2.2@4.95,5.025 5.24,5.025 5.265,5 5.268,5 5.354,4.915 5.536,4.915 U1_QA2.9 ; C4_QA1.1@8.3,5.1 8.3,5.074 C4_QA1.1 C5_QA1.2@8.699,5.024 ; C5_QA1.2@8.7,5.025 8.99,5.025 9.015,5 9.018,5 9.104,4.915 9.286,4.915 U1_QA1.9 ; v1(8.7,7.35) 10.753,7.35 10.953,7.15 11.15,7.15 11.35,6.95 JP_A.2
  Layer 3 (power) w0.25: v1(2.725,10.025) 2.725,9.438 3.363,8.8 3.48,8.8 4.3,7.98 4.3,7.454
  Layer 3 (power) w0.3: v1(0.7,5) 1.2,5.5 1.566,5.5 2.8,6.734 2.8,7.425 2.85,7.475 ; v1(4.6,5) 5.1,5.5 5.487,5.5 6.558,6.57 6.558,7.056 6.546,7.068 6.546,7.554 ; v1@8.4,5.1 8.371,5.129 8.371,5.775 8.3,5.846 8.3,6.466 8.681,6.847 8.681,7.331 v1(8.7,7.35)
  Layer 3 (power) w0.6: 2.85,7.475 2.95,7.375 4.23,7.375 ; 4.409,7.554 4.23,7.375 ; 6.546,7.379 6.475,7.45 4.305,7.45 4.23,7.375 ; 6.546,7.554 8.496,7.554 v1(8.7,7.35)
  other v1: 8.375,5.125
D1V8_VDDIO: C6_QA1.2 C6_QA2.2 C6_QC1.2 C6_QC2.2 JP_D.2 R3.1 R4.1 R7.1 R8.1 U1_QA1.10 U1_QA2.3 U1_QA2.10 U1_QC1.10 U1_QC2.3 U1_QC2.10 | length 36.7
  Top Layer w0.1: R4.1 7.675,5.377 7.95,5.102 7.95,4.806 8.1,4.656 v1@8.1,4.6
  Top Layer w0.15: U1_QC2.3 3.3,7.313 3.407,7.207 3.407,6.876 3.428,6.854 3.428,6.428 v1(3.4,6.4) ; U1_QA2.3@7.075,5.376 R4.1 ; R3.1 11.45,5.375 11.677,5.148
  Top Layer w0.2: v1(3.4,6.4) 3.423,6.423 3.525,6.423 3.55,6.448 R7.1@3.55,6.463
  Top Layer w0.25: v1(0.759,4.287) 0.8,4.287 1.163,4.65 1.3,4.65 1.5,4.45 1.518,4.45 1.554,4.415 1.786,4.415 U1_QC1.10 ; v1(2.212,9.916) 2.212,9.875 2.575,9.512 2.575,9.375 2.375,9.175 2.375,9.157 2.34,9.121 2.34,8.889 U1_QC2.10 ; v1(4.4,4.2) 4.441,4.2 4.823,4.582 4.882,4.582 4.95,4.65 5.05,4.65 5.25,4.45 5.268,4.45 5.304,4.415 5.536,4.415 U1_QA2.10 ; v1@8.1,4.6 8.166,4.6 8.216,4.65 8.8,4.65 9,4.45 9.018,4.45 9.054,4.415 9.286,4.415 U1_QA1.10
  Top Layer w0.3: v1(10.6,8.5) 10.627,8.5 10.677,8.55 JP_D.2
  Layer 3 (power) w0.4: v1@2.188,9.892 2.175,9.906 2.175,10.253 2.497,10.575 3.489,10.575 4.614,9.45 9.65,9.45 v1(10.6,8.5)
  Layer 3 (power) w0.5: v1(0.759,4.287) 0.826,4.353 3.5,4.353 ; v1(3.4,6.4) 3.5,6.3 3.5,4.353 ; v1(8.1,4.575) 6.482,4.575 6.26,4.353 3.5,4.353 ; v1@8.126,4.525 10.082,4.525 10.6,5.043 ; v1(10.6,8.5) 10.6,7.578 10.174,7.153 10.174,6.231 10.75,5.656 10.75,5.193 10.6,5.043 ; v1(11.9,5.1) 11.843,5.043 10.6,5.043
EXT_CHG: J1.47 J1.48 J2.1 | length 5
  Top Layer w0.15: J1.47 16.19,11.9 16.377,12.088 16.377,12.3 J1.48
  Top Layer w0.3: 16.377,12.3 18.091,14.013 18.254,14.013 J2.1
GND: C4_QA1.2 C4_QA2.2 C4_QB1.2 C4_QB2.2 C4_QC1.2 C4_QC2.2 C5_QA1.1 C5_QA2.1 C5_QB1.1 C5_QB2.1 C5_QC1.1 C5_QC2.1 C6_QA1.1 C6_QA2.1 C6_QB1.1 C6_QB2.1 C6_QC1.1 C6_QC2.1 C7.2 C8.2 C9.2 CG1_QA1.1 CG1_QA2.1 CG1_QB1.1 CG1_QB2.1 CG1_QC1.1 CG1_QC2.1 CG2_QA1.1 CG2_QA2.1 CG2_QB1.1 CG2_QB2.1 CG2_QC1.1 CG2_QC2.1 D1_QA1.2 D1_QA2.2 D1_QB1.2 D1_QB2.2 D1_QC1.2 D1_QC2.2 D2_QA1.1 D2_QA2.1 D2_QB1.1 D2_QB2.1 D2_QC1.1 D2_QC2.1 J1.8 J1.18 J1.33 J1.43 J2.2 J2.4 J2.9 J3.1 J3.3 J3.6 J3.9 J4.1 J4.3 J4.6 J4.9 JA1_1.G JA2_1.G JB1_1.G JB2_1.G JC1_1.G JC2_1.G U1_QA1.3 U1_QA1.5 U1_QA1.6 U1_QA1.8 U1_QA2.5 U1_QA2.6 U1_QA2.8 U1_QB1.3 U1_QB1.5 U1_QB1.6 U1_QB1.8 U1_QB2.5 U1_QB2.6 U1_QB2.8 U1_QC1.3 U1_QC1.5 U1_QC1.6 U1_QC1.8 U1_QC2.5 U1_QC2.6 U1_QC2.8 | length 36.5
  Top Layer w0.15: U1_QB1.3 8.913,10.112 9.462,10.112 v1(9.475,10.1) ; v1@11.889,6.6 11.951,6.6 12.226,6.325 12.575,6.325 J1.18 v1(13.3,6.3) ; v1(11.9,6.6) C9.2 ; v1(11.9,8.5) C7.2 ; J1.8 12.602,10.298 13.195,10.298 v1(13.196,10.296) ; v1(15,10.3) J1.43 ; J1.33 v1(16.3,6.3)
  Top Layer w0.25: C4_QC1.2 C5_QC1.1@1.199,5.574 ; C5_QC1.1@1.2,5.575 C5_QC1.1 ; C6_QC1.1 1.3,4.1 1.425,3.975 CG2_QC1.1 ; v1(1.25,5.9) C5_QC1.1 ; CG2_QC2.1 1.9,9.25 2.025,9.375 C6_QC2.1 ; U1_QC1.6 2.285,5.835 2.285,5.476 2.25,5.441 v1(2.25,5.4) 2.238,5.388 1.838,5.388 U1_QC1.8 1.786,5.415 1.46,5.415 1.3,5.575 C5_QC1.1 ; U1_QC1.5 2.815,5.864 2.815,5.505 2.75,5.441 v1(2.75,5.4) 2.762,5.388 3.312,5.388 U1_QC1.3 ; v1(3.325,7.925) 3.366,7.925 3.43,7.86 3.789,7.86 U1_QC2.5 ; v1@3.361,9.234 v1@3.34,9.213 ; v1(3.389,9.304) 3.34,9.254 v1@3.34,9.213 ; C5_QC2.1@3.475,9.45 3.475,9.543 3.499,9.567 C4_QC2.2 ; C5_QC2.1 3.47,9.425 3.34,9.295 v1@3.34,9.213 ; CG1_QC1.1 CG1_QC1.1@3.725,3.839 ; U1_QC2.6 3.76,8.39 3.401,8.39 3.366,8.425 v1(3.325,8.425) 3.313,8.437 3.313,8.837 U1_QC2.8 3.34,8.889 v1@3.34,9.213 ; v1@4.01,3.839 v1(4.024,3.853) ; C6_QA2.1 5.05,4.1 5.175,3.975 CG2_QA2.1 ; C5_QA2.1 5.05,5.575 5.21,5.415 5.536,5.415 U1_QA2.8 5.588,5.388 5.988,5.388 v1(6,5.4) 6,5.441 6.035,5.476 6.035,5.835 U1_QA2.6 ; U1_QB2.5 5.66,9.636 5.66,9.92 5.7,9.959 v1(5.7,10) ; U1_QB2.6 6.19,9.665 6.19,10.024 6.225,10.059 v1(6.225,10.1) 6.237,10.112 6.637,10.112 U1_QB2.8 6.689,10.085 6.965,10.085 C5_QB2.1@7.125,9.925 ; v1(6.5,5.4) 6.5,5.441 6.565,5.505 6.565,5.864 U1_QA2.5 ; CG1_QA2.1 7.475,3.875 v1(7.5,3.9) CG1_QA2.1@7.507,3.9 ; v1(8.15,11.675) CG1_QB1.1 ; C4_QA1.2 C5_QA1.1@8.699,5.574 ; C5_QA1.1@8.7,5.575 C5_QA1.1 ; v1(8.7,6.3) 8.7,6.259 8.75,6.209 C5_QA1.1 ; C6_QA1.1 8.8,4.1 8.925,3.975 CG2_QA1.1 ; U1_QB1.5 9.41,9.636 9.41,9.995 9.475,10.059 v1(9.475,10.1) ; U1_QA1.6 9.785,5.835 9.785,5.476 9.75,5.441 v1(9.75,5.4) 9.738,5.388 9.338,5.388 U1_QA1.8 9.286,5.415 9.01,5.415 8.85,5.575 C5_QA1.1 ; U1_QB1.6 9.94,9.665 9.94,10.024 9.975,10.059 v1(9.975,10.1) 9.987,10.112 10.387,10.112 U1_QB1.8 10.439,10.085 10.715,10.085 10.875,9.925 C5_QB1.1 v1(11,9.9) ; U1_QA1.5 10.315,5.864 10.315,5.505 10.25,5.441 v1(10.25,5.4) 10.799,5.4 U1_QA1.3 ; CG2_QB1.1 10.8,11.525 10.925,11.4 C6_QB1.1 ; C5_QB1.1@11.025,9.925 C4_QB1.2@11.324,9.925 ; CG1_QA1.1@11.225,3.775 CG1_QA1.1@11.225,3.871 ; C4_QB1.2@11.325,9.926 C4_QB1.2
  Top Layer w0.3: CG1_QC1.1@3.725,3.839 v1@4.01,3.839 ; 4.798,5.574 4.798,5.873 v1(4.8,5.875) ; v1(7,11.6) 7.398,11.6 7.598,11.8 v1(7.625,11.8)
  Top Layer w0.35: v1(4.451,11.647) 4.465,11.661 4.75,11.661 CG1_QB2.1
  Bottom Layer w0.3: JB1_1.G@13.175,11.4 13.175,12.036 13.681,12.542 13.681,12.581 v1(13.7,12.6)
  Bottom Layer w0.4: v1(1.76,9.49) 2.078,9.172 2.505,9.172 2.825,8.852 JC2_1.G@2.825,8.4 ; JC1_1.G@4.7,6.3 4.7,5.975 v1(4.8,5.875) ; v1(5.7,10) 5.7,8.475 JC2_1.G@5.775,8.4 ; v1(6.225,10.1) 6.225,10.266 6.239,10.279 6.239,11.114 JB2_1.G@6.525,11.4 ; v1(7.2,9.9) 7.796,9.9 v1(7.843,9.947) ; JA2_1.G@8,5.975 8,6 8.3,6.3 v1(8.7,6.3) ; v1(9.475,10.1) JB2_1.G@9.475,11.4 ; v1(9.975,10.1) 9.975,11.15 JB1_1.G@10.225,11.4 ; v1(11,9.9) 11.675,9.9 JB1_1.G@11.7,9.925
  other v1: 2.579,2.884 6.329,2.884 10.079,2.884 1.185,3.835 4.935,3.835 8.685,3.835 11.2,3.9 6.15,4.95 13.5,5.5 4.7,6.35 1.9,6.8 0.709,8.096 2.8,8.1 5.8,8.1 11.9,10 11.04,11.665 5.896,12.716 9.646,12.716
NetC1_QA1_2: C1_QA1.2 R1_QA1.1 | length 0.5
  Top Layer w0.15: R1_QA1.1 11.25,3.325 11.325,3.4 C1_QA1.2
NetC1_QA2_2: C1_QA2.2 R1_QA2.1 | length 0.5
  Top Layer w0.15: R1_QA2.1 7.5,3.325 7.575,3.4 C1_QA2.2
NetC1_QB1_2: C1_QB1.2 R1_QB1.1 | length 0.5
  Top Layer w0.15: C1_QB1.2 8.4,12.15 8.513,12.15 8.538,12.175 R1_QB1.1
NetC1_QB2_2: C1_QB2.2 R1_QB2.1 | length 0.5
  Top Layer w0.15: C1_QB2.2 4.65,12.15 4.763,12.15 4.788,12.175 R1_QB2.1
NetC1_QC1_2: C1_QC1.2 R1_QC1.1 | length 0.5
  Top Layer w0.15: R1_QC1.1 3.75,3.325 3.825,3.4 C1_QC1.2
NetC1_QC2_2: C1_QC2.2 R1_QC2.1 | length 0.5
  Top Layer w0.15: R1_QC2.1 1.25,6.988 1.275,6.963 1.275,6.85 C1_QC2.2
NetC2_QA1_2: C2_QA1.2 R2_QA1.1 | length 0.5
  Top Layer w0.15: C2_QA1.2 8.825,3.35 8.938,3.35 8.963,3.325 R2_QA1.1
NetC2_QA2_2: C2_QA2.2 R2_QA2.1 | length 0.5
  Top Layer w0.15: C2_QA2.2 5.075,3.35 5.188,3.35 5.213,3.325 R2_QA2.1
NetC2_QB1_2: C2_QB1.2 R2_QB1.1 | length 0.5
  Top Layer w0.15: R2_QB1.1 10.825,12.175 10.9,12.1 C2_QB1.2
NetC2_QB2_2: C2_QB2.2 R2_QB2.1 | length 0.5
  Top Layer w0.15: R2_QB2.1 7.075,12.175 7.15,12.1 C2_QB2.2
NetC2_QC1_2: C2_QC1.2 R2_QC1.1 | length 0.5
  Top Layer w0.15: C2_QC1.2 1.325,3.35 1.438,3.35 1.463,3.325 R2_QC1.1
NetC2_QC2_2: C2_QC2.2 R2_QC2.1 | length 0.5
  Top Layer w0.15: R2_QC2.1 1.25,9.275 1.325,9.35 C2_QC2.2
NetJ1_21: J1.21 J6.1 | length 6.2
  Top Layer w0.15: J1.21 13.175,5.1 14.064,4.211 14.064,2.839 14.953,1.95 15.14,1.95 J6.1
NetJ1_22: J1.22 J6.2 | length 5.1
  Top Layer w0.15: J1.22 13.175,4.7 13.814,4.061 13.814,2.006 J6.2
NetJ1_23: J1.23 J6.3 | length 4
  Top Layer w0.15: J1.23 12.625,4.275 12.875,4.275 12.975,4.175 13.022,4.175 13.564,3.634 13.564,0.986 J6.3
NetJ1_38: J1.38 J5.3 | length 9.2
  Top Layer w0.15: v1(13.8,9.4) 14.9,8.3 J1.38
  Layer 2 (signal) w0.15: J5.3 13.725,14.846 12.975,14.096 12.975,12.499 13.8,11.674 v1(13.8,9.4)
NetJ1_39: J1.39 J5.2 | length 7.8
  Top Layer w0.15: v1(14.9,9.3) 14.948,9.252 14.948,9.055 15.178,8.825 15.225,8.825 15.325,8.725 15.575,8.725 J1.39
  Layer 2 (signal) w0.15: v1(14.9,9.3) 15.325,9.725 15.325,12.459 14.995,12.789 J5.2
NetJ1_40: J1.40 J5.1 | length 7.1
  Top Layer w0.15: J1.40 15.625,9.125 15.875,9.125 15.975,9.225 16.022,9.225 16.3,9.503 v1(16.3,10.6) ; J5.1 16.3,15.69 v1(16.3,13.3)
  Bottom Layer w0.15: v1(16.3,10.6) v1(16.3,13.3)
NetJA1_1_S: JA1_1.S JPA1.2 | length 1.9
  Bottom Layer w0.15: JPA1.2 10.1,2.35 10.15,2.4 10.2,2.4 10.425,2.625 10.425,2.655 10.645,2.875 10.675,2.875 10.825,3.025 JA1_1.S
NetJA2_1_S: JA2_1.S JPA2.2 | length 2.3
  Bottom Layer w0.15: JPA2.2@6.3,2.25 6.35,2.2 6.403,2.2 6.653,1.95 7.047,1.95 7.613,2.515 7.613,2.518 8,2.905 JA2_1.S
NetJB1_1_S: JB1_1.S JPB1.2 | length 2.3
  Bottom Layer w0.15: JPB1.2 9.65,13.35 9.7,13.3 9.75,13.3 10.175,12.875 JB1_1.S
NetJB2_1_S: JB2_1.S JPB2.2 | length 2.2
  Bottom Layer w0.15: JPB2.2 6,13.25 6.05,13.2 6.1,13.2 6.425,12.875 JB2_1.S
NetJC1_1_S: JC1_1.S JPC1.2 | length 2
  Bottom Layer w0.1: JPC1.2 2.6,2.45 2.675,2.525 2.725,2.525 3,2.8
  Bottom Layer w0.15: 3,2.8 3.225,3.025 JC1_1.S
NetJC2_1_S: JC2_1.S JPC2.2 | length 5.9
  Bottom Layer w0.15: JPC2.2 1.25,8.2 1.55,8.5 1.55,8.99 1.385,9.155 1.385,9.655 1.575,9.845 1.575,10.475 2,10.9 2.9,10.9 3.664,10.136 4.039,10.136 JC2_1.S
QA1_Q1: C1_QA1.1 D1_QA1.1 J3.2 JPA1.1 | length 3
  Top Layer w0.15: v1(10.8,2.5) 11.05,2.25 ; J3.2 11.05,0.96 11.05,2.25 ; C1_QA1.1 11.05,2.85 10.975,2.775 D1_QA1.1 11.05,2.65 11.05,2.25
  Bottom Layer w0.15: JPA1.1 10.65,2.35 v1(10.8,2.5)
QA1_Q2: C2_QA1.1 D2_QA1.2 J3.4 JPA1.3 | length 2.9
  Top Layer w0.15: J3.4 9.175,1.455 D2_QA1.2@9.175,2.7 ; C2_QA1.1 9.1,2.85 D2_QA1.2@9.175,2.775
  Bottom Layer w0.15: v1(9.4,2.7) 9.448,2.652 9.448,2.552 9.55,2.45 JPA1.3@9.55,2.4
QA2_Q1: C1_QA2.1 D1_QA2.1 J3.5 JPA2.1 | length 3.1
  Top Layer w0.15: v1(7,2.8) 7.15,2.8 D1_QA2.1 ; D1_QA2.1@7.216,2.734 7.275,2.675 7.275,0.925 J3.5 ; D1_QA2.1@7.225,2.775 7.3,2.85 C1_QA2.1
  Bottom Layer w0.15: JPA2.1@6.85,2.35 6.9,2.4 6.923,2.4 7.011,2.488 7.011,2.789 v1(7,2.8)
QA2_Q2: C2_QA2.1 D2_QA2.2 J3.7 JPA2.3 | length 3.1
  Top Layer w0.15: J3.7 4.785,1.985 5.425,2.625 D2_QA2.2 ; C2_QA2.1 5.35,2.85 D2_QA2.2@5.425,2.775
  Bottom Layer w0.15: v1(5.6,2.8) 5.6,2.732 5.719,2.613 5.719,2.331 JPA2.3
QA_1.I2C/CS: R3.2 U1_QA1.2 | length 0.6
  Top Layer w0.15: U1_QA1.2 10.849,4.85 11.375,4.85 R3.2
QA_1.INT1: J1.30 U1_QA1.7 | length 9.1
  Top Layer w0.15: U1_QA1.7 9.326,6.408 9.45,6.532 v1(9.45,6.6) ; v1(14.1,6.6) 14.1,5.57 14.745,4.925 15.055,4.925 15.105,4.975 15.225,4.975 15.325,5.075 15.575,5.075 J1.30
  Layer 2 (signal) w0.15: v1(9.45,6.6) 10.003,7.153 10.95,7.153 11.358,6.745 11.358,6.682 11.765,6.275 12.7,6.275 13.05,6.625 14.075,6.625 v1(14.1,6.6)
QA_1.SCL/SCK: J1.31 TP5.1 U1_QA1.1 U1_QA2.1 | length 11.4
  Top Layer w0.15: U1_QA2.1 7.725,4.375 v1(8.1,4) ; U1_QA1.1 11.256,4.375 11.652,3.978 11.652,3.898 v1(11.7,3.85) ; v1(14.9,5.3) 14.903,5.3 15.103,5.5 J1.31
  Layer 2 (signal) w0.15: v1(8.1,4) 8.168,4 8.393,4.225 11.335,4.225 11.7,3.86 v1(11.7,3.85) ; v1@11.751,3.85 14.651,3.85 14.925,4.124 14.925,5.275 v1(14.9,5.3)
QA_1.SDA/MOSI: J1.29 TP6.1 U1_QA1.4 U1_QA2.4 | length 10.4
  Top Layer w0.15: U1_QA2.4 7.087,5.888 7.087,6.587 v1(7.1,6.6) ; 14.493,4.675 15.159,4.675 15.575,4.675 J1.29
  Top Layer w0.3: U1_QA1.4 10.841,5.875 10.856,5.89 10.856,6.219 v1(10.875,6.238)
  Layer 2 (signal) w0.15: v1@7.113,6.6 7.131,6.582 7.525,6.582 7.732,6.375 8.158,6.375 8.408,6.625 8.835,6.625 9.025,6.435 9.025,6.424 9.274,6.175 10.812,6.175 v1(10.875,6.238) 11.388,5.725 12.381,5.725 13.306,4.8 v1(14.3,4.8)
QA_2.I2C/CS: R4.2 U1_QA2.2 | length 0.6
  Top Layer w0.15: U1_QA2.2 7.098,4.851 7.601,4.851 R4.2
QA_2.INT1: J1.28 U1_QA2.7 | length 11.9
  Top Layer w0.15: U1_QA2.7 5.613,5.875 5.703,5.965 5.703,6.281 v1(6.158,6.736) ; v1(14.5,4.3) J1.28
  Layer 2 (signal) w0.15: v1(6.158,6.736) 6.869,6.025 8.449,6.025 9.399,5.075 10.619,5.075 10.969,5.425 12.138,5.425 13.263,4.3 v1(14.5,4.3)
QB1_Q1: C1_QB1.1 D1_QB1.1 J4.4 JPB1.1 | length 3.9
  Top Layer w0.15: C1_QB1.1 8.675,12.65 8.75,12.725 D1_QB1.1 8.738,12.787 8.738,13.426 8.686,13.478 8.686,15.684 J4.4
  Bottom Layer w0.15: v1(8.727,13.437) 8.764,13.4 JPB1.1
QB1_Q2: C2_QB1.1 D2_QB1.2 J4.2 JPB1.3 | length 4.1
  Top Layer w0.15: C2_QB1.1 10.625,12.65 10.55,12.725 D2_QB1.2 10.575,12.8 10.575,13.375 11.185,13.985 J4.2
  Bottom Layer w0.15: JPB1.3 v1(10.6,13.4)
QB2_Q1: C1_QB2.1 D1_QB2.1 J4.7 JPB2.1 | length 3.9
  Top Layer w0.15: C1_QB2.1 4.925,12.65 5,12.725 5,13.3 ; J4.7 5,15.56 5,13.3 ; v1(5.447,13.307) 5.441,13.3 5,13.3
QB2_Q2: C2_QB2.1 D2_QB2.2 J4.5 JPB2.3 | length 3.8
  Top Layer w0.15: v1(6.55,13.3) 6.598,13.252 6.598,13.077 6.8,12.875 6.8,12.725 6.875,12.65 C2_QB2.1 ; 6.8,13.3 7.375,13.875 J4.5
QB_1.I2C/CS: R5.2 U1_QB1.2 | length 0.8
  Top Layer w0.15: R5.2 8.35,10.175 8.523,10.348 8.523,10.362 8.696,10.535 8.811,10.535 U1_QB1.2
QB_1.INT1: J1.27 U1_QB1.7 | length 14.2
  Top Layer w0.15: v1@9.907,8.507 10.399,8.999 U1_QB1.7 ; J1.27 16.175,3.9 16.975,4.7 16.975,7.925 v1(16.3,8.6)
  Layer 2 (signal) w0.15: v1(9.9,8.5) 10.525,9.125 12.162,9.125 12.812,8.475 16.107,8.475 16.232,8.6 v1(16.3,8.6)
QB_1.SCL/SCK: J1.34 TP3.1 U1_QB1.1 U1_QB2.1 | length 19.2
  Top Layer w0.15: v1(3.9,10.8) 4.225,11.125 U1_QB2.1 ; v1(8.425,11.2) 8.462,11.163 8.863,11.163 U1_QB1.1 ; v1(13.3,9.2) 13.946,8.554 14.277,8.554 14.875,7.955 14.875,7.128 15.178,6.825 15.225,6.825 15.325,6.725 15.575,6.725 J1.34
  Layer 2 (signal) w0.15: v1(3.9,10.8) 5.287,9.413 8.425,9.413 ; v1(8.4,9) 8.425,9.025 8.425,9.413 ; v1(8.425,11.2) 8.425,9.413 ; v1(13.3,9.2) 12.175,10.325 10.722,10.325 9.81,9.413 8.425,9.413
  Bottom Layer w0.15: v1(8.4,9) TP3.1
QB_1.SDA/MOSI: J1.32 TP4.1 U1_QB1.4 U1_QB2.4 | length 15.1
  Top Layer w0.15: U1_QB2.4 5.151,9.235 5.886,8.5 7.53,8.5 7.83,8.2 v1(8.9,8.2) U1_QB1.4 ; v1(14.5,7.8) 14.5,6.43 15.03,5.9 J1.32
  Layer 2 (signal) w0.15: v1(8.9,8.2) 9.599,8.2 9.724,8.075 10.635,8.075 11.385,8.825 12.038,8.825 13.063,7.8 v1(14.5,7.8)
QB_2.I2C/CS: R6.2 U1_QB2.2 | length 0.6
  Top Layer w0.15: R6.2@4.563,10.675 5.101,10.675 U1_QB2.2
QB_2.INT1: J1.26 U1_QB2.7 | length 18.4
  Top Layer w0.15: U1_QB2.7 6.649,9.018 6.7,8.968 v1(6.7,8.9) ; J1.26 16.175,3.5 17.225,4.55 17.225,8.469 v1(16.593,9.101)
  Layer 2 (signal) w0.15: v1(6.7,8.9) 7.025,8.575 8.674,8.575 9.212,9.113 9.934,9.113 10.246,9.425 12.286,9.425 12.936,8.775 14.976,8.775 15.302,9.101 v1(16.593,9.101)
QC1_Q1: C1_QC1.1 D1_QC1.1 J3.8 JPC1.1 | length 2.6
  Top Layer w0.15: v1(3.5,2.3) 3.507,2.293 3.507,0.883 J3.8 ; D1_QC1.1@3.55,2.85 C1_QC1.1
  Top Layer w0.3: D1_QC1.1 3.475,2.352 3.5,2.327 v1(3.5,2.3)
  Bottom Layer w0.3: JPC1.1 JPC1.1 3.248,2.3 v1(3.5,2.3)
QC1_Q2: C2_QC1.1 D2_QC1.2 J3.10 JPC1.3 | length 3.1
  Top Layer w0.15: J3.10 1.7,1.6 v1(1.7,2.2) 1.688,2.212 1.688,2.713 D2_QC1.2 1.675,2.775 1.6,2.85 C2_QC1.1
  Bottom Layer w0.15: v1(1.7,2.2) 1.768,2.2 1.868,2.3 2,2.3 2.05,2.35 JPC1.3
QC2_Q1: C1_QC2.1 D1_QC2.1 J4.10 JPC2.1 | length 11.6
  Top Layer w0.15: v1(0.433,6.768) v1@0.449,6.784 ; v1(0.638,10.631) 1.025,11.018 J4.10 ; D1_QC2.1 0.7,7.2 0.775,7.125 C1_QC2.1 C1_QC2.1@0.759,6.784
  Top Layer w0.3: v1@0.449,6.784 C1_QC2.1@0.759,6.784
  Layer 2 (signal) w0.15: v1(0.433,6.768) 1.034,7.369 1.034,8.802 0.638,9.198 v1(0.638,10.631)
  Bottom Layer w0.15: v1(0.433,6.768) 1.1,7.435 1.1,7.6 1.15,7.65 JPC2.1
QC2_Q2: C2_QC2.1 D2_QC2.2 J4.8 JPC2.3 | length 9.5
  Top Layer w0.15: D2_QC2.2 0.7,9 0.775,9.075 0.775,9.45 1.152,9.827 1.152,9.952 2.175,10.975 2.175,14.335 J4.8
  Bottom Layer w0.15: JPC2.3 1.15,8.8 1.096,8.8 0.95,8.946 0.95,9.75 v1(1.2,10)
QC_1.I2C/CS: R7.2 U1_QC1.2 | length 2
  Top Layer w0.1: U1_QC1.2 3.362,4.875 3.547,5.06 3.589,5.06 3.75,5.222 3.75,5.596 4.1,5.946 R7.2@4.1,6.5
QC_1.INT1: J1.25 U1_QC1.7 | length 18.2
  Top Layer w0.15: v1@0.6,3.411 0.6,3.451 0.325,3.726 0.325,5.597 1.003,6.275 1.405,6.275 1.625,6.055 1.625,6.038 1.788,5.875 U1_QC1.7 ; v1(11.9,1.9) 11.9,3.05 12.325,3.475 12.575,3.475 J1.25
  Layer 2 (signal) w0.15: v1(0.6,3.4) 1.603,3.4 3.103,1.9 v1(11.9,1.9)
QC_1.SCL/SCK: J1.36 TP1.1 U1_QC1.1 U1_QC2.1 | length 19.6
  Top Layer w0.15: U1_QC2.1 2.352,7.298 2.352,6.948 v1(2.4,6.9) ; U1_QC1.1 3.362,4.375 3.522,4.535 3.599,4.535 4.1,5.036 v1(4.1,5.1) ; J1.36 v1(16.3,7.5)
  Layer 2 (signal) w0.15: v1(2.4,6.9) 2.425,6.875 4.1,6.875 ; v1(4.1,5.1) 4.1,6.875 ; v1(7.375,8.125) 7.4,8.1 7.4,7.775 ; v1(16.3,7.5) 14.801,7.5 14.676,7.375 14.324,7.375 14.199,7.5 11.516,7.5 11.256,7.761 8.738,7.761 8.724,7.775 7.4,7.775 ; 4.1,6.875 4.686,7.461 7.086,7.461 7.4,7.775
  Bottom Layer w0.15: v1(7.375,8.125) 7.423,8.173 7.551,8.173 7.778,8.4 TP1.1
QC_1.SDA/MOSI: J1.35 TP2.1 U1_QC1.4 U1_QC2.4 | length 17.3
  Top Layer w0.1: 3.825,6.125 3.825,6.772 4,6.947
  Top Layer w0.15: U1_QC1.4 3.414,5.965 3.665,5.965 3.825,6.125 ; 4,6.947 4,7.061 3.912,7.149 3.912,7.223 3.89,7.223 3.8,7.313 U1_QC2.4 3.89,7.261 3.89,7.351 4.749,7.351 v1(5.2,6.9) ; J1.35 16.332,7.1 16.532,6.9 v1(16.6,6.9)
  Layer 2 (signal) w0.15: v1(5.2,6.9) 5.268,6.9 5.529,7.161 7.547,7.161 v1(7.908,6.8) ; 8.071,6.925 9.174,6.925 9.702,7.453 11.139,7.453 11.517,7.075 14.226,7.075 14.401,6.9 v1(16.6,6.9)
  Bottom Layer w0.15: TP2.1 7.904,7.396 7.904,6.804 v1(7.908,6.8)
QC_2.I2C/CS: R8.2 U1_QC2.2 | length 0.5
  Top Layer w0.2: U1_QC2.2 2.865,7.286 2.865,6.973 R8.2@2.949,6.888
QC_2.INT1: J1.24 U1_QC2.7 | length 11.8
  Top Layer w0.15: v1(4.083,8.948) 4.133,8.948 5.575,7.506 5.575,6.726 5.3,6.451 v1(5.3,6.4) ; v1(11.9,4.5) 11.948,4.452 11.948,4.255 12.178,4.025 12.225,4.025 12.325,3.925 12.575,3.925 J1.24
  Layer 2 (signal) w0.15: v1(5.3,6.4) 5.975,5.725 8.325,5.725 9.525,4.525 11.875,4.525 v1(11.9,4.5)
QVAR1_QA1: C3_QA1.1 CG1_QA1.2 R1_QA1.2 U1_QA1.12 | length 1.4
  Top Layer w0.15: U1_QA1.12 10.338,4.363 10.338,3.837 C3_QA1.1 ; R1_QA1.2 C3_QA1.1 ; CG1_QA1.2 C3_QA1.1
QVAR1_QA2: C3_QA2.1 CG1_QA2.2 R1_QA2.2 U1_QA2.12 | length 1.4
  Top Layer w0.15: U1_QA2.12 6.588,4.363 6.588,3.837 C3_QA2.1 ; R1_QA2.2 C3_QA2.1 ; CG1_QA2.2 C3_QA2.1
QVAR1_QB1: C3_QB1.1 CG1_QB1.2 R1_QB1.2 U1_QB1.12 | length 1.4
  Top Layer w0.15: CG1_QB1.2 C3_QB1.1 ; R1_QB1.2 C3_QB1.1 ; U1_QB1.12 9.387,11.137 9.387,11.663 C3_QB1.1
QVAR1_QB2: C3_QB2.1 CG1_QB2.2 R1_QB2.2 U1_QB2.12 | length 1.4
  Top Layer w0.15: CG1_QB2.2 C3_QB2.1 ; R1_QB2.2 C3_QB2.1 ; U1_QB2.12 5.637,11.137 5.637,11.663 C3_QB2.1
QVAR1_QC1: C3_QC1.1 CG1_QC1.2 R1_QC1.2 U1_QC1.12 | length 1.4
  Top Layer w0.15: U1_QC1.12 2.838,4.363 2.838,3.837 C3_QC1.1 ; R1_QC1.2 C3_QC1.1 ; CG1_QC1.2 C3_QC1.1
QVAR1_QC2: C3_QC2.1 CG1_QC2.2 R1_QC2.2 U1_QC2.12 | length 1.4
  Top Layer w0.15: R1_QC2.2 C3_QC2.1 ; CG1_QC2.2 C3_QC2.1 ; U1_QC2.12 2.288,7.837 1.762,7.837 C3_QC2.1
QVAR2_QA1: C3_QA1.2 CG2_QA1.2 R2_QA1.2 U1_QA1.11 | length 1.4
  Top Layer w0.15: CG2_QA1.2 C3_QA1.2 ; R2_QA1.2 C3_QA1.2 ; U1_QA1.11 9.812,4.363 9.812,3.837 C3_QA1.2
QVAR2_QA2: C3_QA2.2 CG2_QA2.2 R2_QA2.2 U1_QA2.11 | length 1.4
  Top Layer w0.15: CG2_QA2.2 C3_QA2.2 ; R2_QA2.2 C3_QA2.2 ; U1_QA2.11 6.062,4.363 6.062,3.837 C3_QA2.2
QVAR2_QB1: C3_QB1.2 CG2_QB1.2 R2_QB1.2 U1_QB1.11 | length 1.4
  Top Layer w0.15: U1_QB1.11 9.912,11.137 9.912,11.663 C3_QB1.2 ; R2_QB1.2 C3_QB1.2 ; CG2_QB1.2 C3_QB1.2
QVAR2_QB2: C3_QB2.2 CG2_QB2.2 R2_QB2.2 U1_QB2.11 | length 1.4
  Top Layer w0.15: U1_QB2.11 6.162,11.137 6.162,11.663 C3_QB2.2 ; R2_QB2.2 C3_QB2.2 ; CG2_QB2.2 C3_QB2.2
QVAR2_QC1: C3_QC1.2 CG2_QC1.2 R2_QC1.2 U1_QC1.11 | length 1.4
  Top Layer w0.15: CG2_QC1.2 C3_QC1.2 ; R2_QC1.2 C3_QC1.2 ; U1_QC1.11 2.312,4.363 2.312,3.837 C3_QC1.2
QVAR2_QC2: C3_QC2.2 CG2_QC2.2 R2_QC2.2 U1_QC2.11 | length 1.4
  Top Layer w0.15: R2_QC2.2 C3_QC2.2 ; CG2_QC2.2 C3_QC2.2 ; U1_QC2.11 2.288,8.363 1.762,8.363 C3_QC2.2
R\S\T: J1.5 J2.5 | length 7
  Top Layer w0.15: J1.5 v1(14.9,11.5)
  Bottom Layer w0.15: v1(14.9,11.5) 15.925,10.475 15.925,10.445 16.145,10.225 16.175,10.225 17.045,9.355 J2.5
SWDCLK: J1.45 J2.6 | length 5.2
  Top Layer w0.15: J1.45 17.13,11.1 17.794,10.436 17.794,8.966 J2.6
SWDIO: J1.46 J2.7 | length 6.8
  Top Layer w0.15: J1.46 v1(17,11.5) ; v1(17,10.7) 17.544,10.156 17.544,7.946 J2.7
  Bottom Layer w0.15: v1(17,10.7) v1(17,11.5)
VA0: C9.1 J1.41 JP_A.1 | length 5.7
  Top Layer w0.15: JP_A.1@11.5,7.5 C9.1 ; C9.1@11.852,7.55 11.9,7.55 v1(11.9,8) ; v1(13.3,9.7) 13.368,9.7 13.443,9.775 14.955,9.775 15.105,9.625 15.225,9.625 15.325,9.525 15.575,9.525 J1.41
  Layer 3 (power) w0.3: v1(11.9,8) 11.927,8 12.027,8.1 12.066,8.1 12.64,8.675 12.64,9.106 13.215,9.681 13.281,9.681 v1(13.3,9.7)
VBAT: J1.1 J1.2 J2.3 | length 7.4